# EAGLE board decade-counter (EAGLE 9.7.0)

Size 170.64 x 54.4 mm. Coordinates in mm from the lower left corner, seen from the top.
Outline: 0,0 170.64,0 170.64,54.4 0,54.4 0,0
Copper layers (1*16): Top 0.035mm / dielectric 1.5mm / Bottom 0.035mm
Design rules "default": minimum track width 6mil, minimum drill 0.35mm, track to track 6mil, track to pad 6mil, pad to pad 6mil, via to via 6mil, smd to smd 6mil, copper to edge 40mil, drill to drill 6mil, minimum pad ring 10mil, minimum via ring 8mil, stop-mask expansion 4mil, vias tented up to drill 0mil, thermal gap 10mil

## Footprints (pad centres in the part's own frame; a part is rotated, then mirrored left to right if it is on the bottom)
LEDRD254W60D565H860B = drill 0.981 pad 1.581: 1 -1.27,0; 2 1.27,0
BATTERY-GENERIC = drill 1.118 pad 3.15 octagon: + 2.54,0; - -2.54,0
RESAD1016W63L850D250B = drill 0.83 pad 1.43: 1 -5.08,0; 2 5.08,0
SWITCH-MOMENTARY-PTH-6.5MM = drill 1.016 pad 1.88: 1 -3.251,2.261; 2 3.251,2.261; 3 -3.251,-2.261; 4 3.251,-2.261
DIP762W53P254L1969H508Q16B = drill 0.743 pad 1.343: 1 -3.81,8.89; 2 -3.81,6.35; 3 -3.81,3.81; 4 -3.81,1.27; 5 -3.81,-1.27; 6 -3.81,-3.81; 7 -3.81,-6.35; 8 -3.81,-8.89; 9 3.81,-8.89; 10 3.81,-6.35; 11 3.81,-3.81; 12 3.81,-1.27; 13 3.81,1.27; 14 3.81,3.81; 15 3.81,6.35; 16 3.81,8.89

## Placement (x,y rotation side)
D1  RED  [LEDRD254W60D565H860B]  96,16.55 180 top
D2  RED  [LEDRD254W60D565H860B]  103.62,16.55 180 top
D3  RED  [LEDRD254W60D565H860B]  111.24,16.55 180 top
D4  RED  [LEDRD254W60D565H860B]  118.86,16.55 180 top
D5  RED  [LEDRD254W60D565H860B]  126.48,16.55 180 top
D6  RED  [LEDRD254W60D565H860B]  134.1,16.55 180 top
D7  RED  [LEDRD254W60D565H860B]  141.72,16.55 180 top
D8  RED  [LEDRD254W60D565H860B]  149.34,16.55 180 top
D9  RED  [LEDRD254W60D565H860B]  156.96,16.55 180 top
D10  RED  [LEDRD254W60D565H860B]  164.58,16.55 180 top
P1  BATTERYGENERIC  [BATTERY-GENERIC]  8.26,46.15 180 top
R1  1k  [RESAD1016W63L850D250B]  94.73,26.71 90 top
R2  1k  [RESAD1016W63L850D250B]  102.35,26.71 90 top
R3  1k  [RESAD1016W63L850D250B]  109.97,26.71 90 top
R4  1k  [RESAD1016W63L850D250B]  117.59,26.71 90 top
R5  1k  [RESAD1016W63L850D250B]  125.21,26.71 90 top
R6  1k  [RESAD1016W63L850D250B]  132.83,26.71 90 top
R7  1k  [RESAD1016W63L850D250B]  140.45,26.71 90 top
R8  1k  [RESAD1016W63L850D250B]  148.07,26.71 90 top
R9  1k  [RESAD1016W63L850D250B]  155.69,26.71 90 top
R10  1k  [RESAD1016W63L850D250B]  163.31,26.71 90 top
S1  SWITCH_MOMENTARY  [SWITCH-MOMENTARY-PTH-6.5MM]  41.39,7.66 90 top
U3  74HC4017_PDIP  [DIP762W53P254L1969H508Q16B]  73.14,7.66 90 top

## Library data of the parts
D1-D10 = Tinkercad; CATEGORY: Opto-Electronic; SUB-CATEGORY: LED; VALUE: LED_RED
P1 R1-R10 S1 U3 = Tinkercad

## Nets
D1_C: D1.2 R1.1
D2_C: D2.2 R2.1
D3_C: D3.2 R3.1
D4_C: D4.2 R4.1
D5_C: D5.2 R5.1
D6_C: D6.2 R6.1
D7_C: D7.2 R7.1
D8_C: D8.2 R8.1
D9_C: D9.2 R9.1
D10_C: D10.2 R10.1
P1+: P1.+ S1.1 S1.2 U3.16
P1-: P1.- R1.2 R2.2 R3.2 R4.2 R5.2 R6.2 R7.2 R8.2 R9.2 R10.2 U3.15
U3_CLK: S1.3 S1.4 U3.14
U3_Q0: D1.1 U3.3
U3_Q1: D2.1 U3.2
U3_Q2: D3.1 U3.4
U3_Q3: D4.1 U3.7
U3_Q4: D5.1 U3.10
U3_Q5: D6.1 U3.1
U3_Q6: D7.1 U3.5
U3_Q7: D8.1 U3.6
U3_Q8: D9.1 U3.9
U3_Q9: D10.1 U3.11

## Tracks (layer width: path | path; a pad name or v marks a point on that pad's centre or on a via)
D1_C  (1 unrouted)
D2_C  (1 unrouted)
D3_C  (1 unrouted)
D4_C  (1 unrouted)
D5_C  (1 unrouted)
D6_C  (1 unrouted)
D7_C  (1 unrouted)
D8_C  (1 unrouted)
D9_C  (1 unrouted)
D10_C  (1 unrouted)
P1+  (3 unrouted)
P1-  (11 unrouted)
U3_CLK  (2 unrouted)
U3_Q0  (1 unrouted)
U3_Q1  (1 unrouted)
U3_Q2  (1 unrouted)
U3_Q3  (1 unrouted)
U3_Q4  (1 unrouted)
U3_Q5  (1 unrouted)
U3_Q6  (1 unrouted)
U3_Q7  (1 unrouted)
U3_Q8  (1 unrouted)
U3_Q9  (1 unrouted)